# Altium PCB CUSP_PI_Hat.PcbDoc
Units mm, origin at the board's own origin, x right, y up, seen from the top; angles counter-clockwise.
Board outline 64.99 x 16.25 mm, 2 copper layers (Top Layer, Bottom Layer), stack 1.1 mm thick; 7 components, 30 nets, 90 pads, 15 vias.
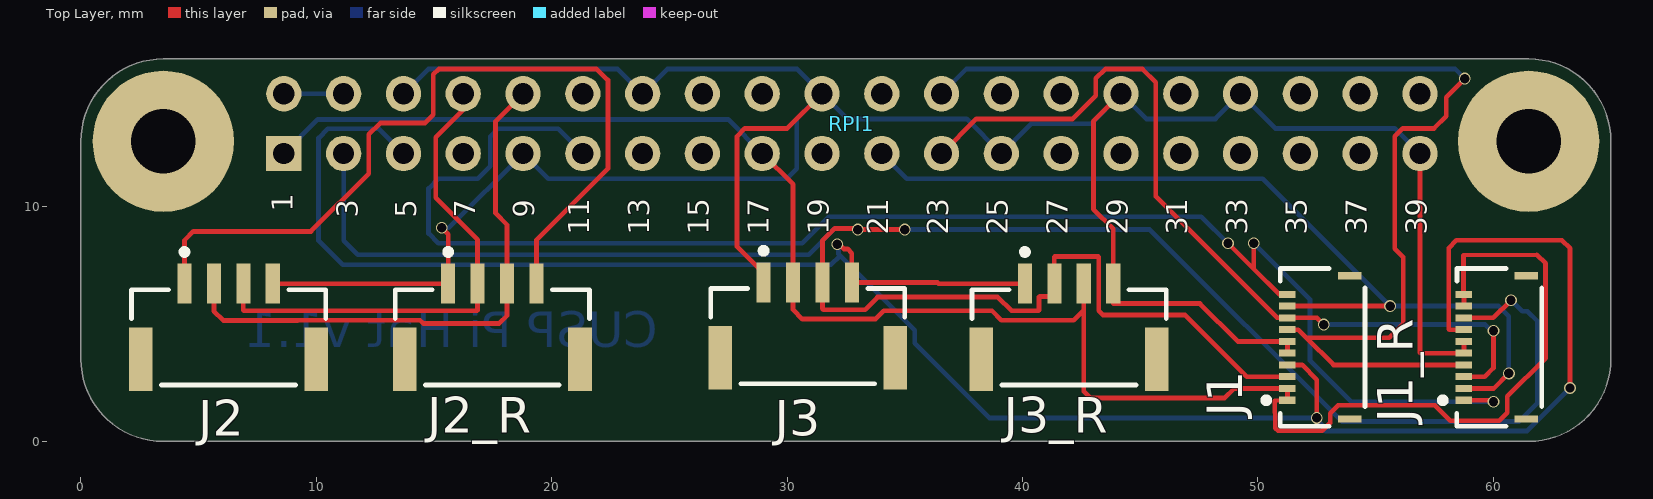
[diagram p0: Top Layer view]
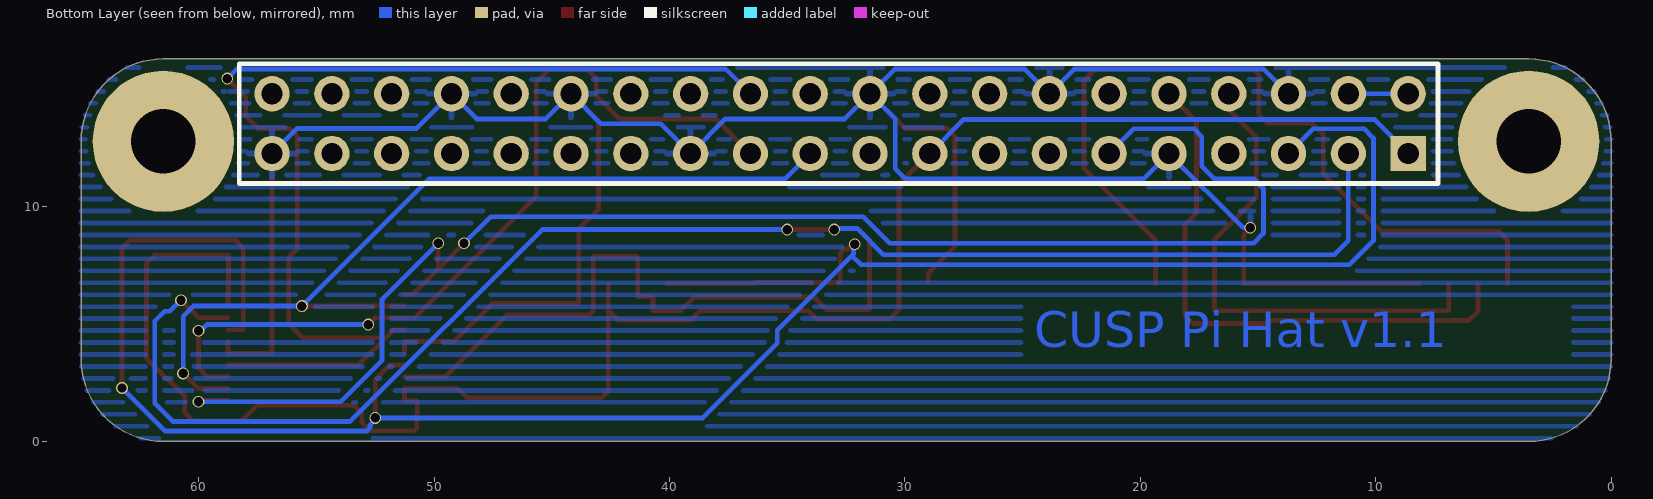
[diagram p1: Bottom Layer view, seen from below]

## Layer stack, top to bottom
Top Solder: solder mask 0.05, Solder Resist, Dk 3.5
Top Layer: signal copper 0.1
Dielectric 1: dielectric 0.9, FR-4, Dk 4.6
Bottom Layer: signal copper 0.1
Bottom Solder: solder mask 0.05, Solder Resist, Dk 3.5

## Board outline
0,3.5 0,12.75 cw(c3.5,12.75) 3.5,16.25 61.5,16.25 cw(c61.496,12.754) 64.992,12.75 64.992,3.5 cw(c61.496,3.496) 61.5,0 3.5,0 cw(c3.5,3.5)

## Design rules (kind name [scope] priority, off if disabled: settings)
Clearance [All] p1: gap=0.2 ignorepadtopadclearanceinfootprint=FALSE
HoleSize [All] p1: absolutevalues=TRUE maxlimit=3 minlimit=0.025 maxpercent=80.000 minpercent=20.000
PolygonConnect [All] p1: connectstyle=Relief reliefconductorwidth=0.254 reliefentries=4 polygonreliefangle="90 Angle" airgapwidth=0.254
RoomDefinition CUSP_PI_Hat [InComponentClass('CUSP_PI_Hat')] p1: confinementstyle=ConfineIn formatcopy=TRUE lockcomponents=FALSE outline 65.5,-0.5 -0.5,-0.5 -0.5,16.5 65.5,16.5
RoutingVias [All] p1: holewidth=0.4 width=0.5 viastyle="Through Hole" minholewidth=0.4 minwidth=0.5 maxholewidth=0.4 maxwidth=0.5
SilkToSolderMaskClearance [IsPad] p1: minsilkscreentomaskgap=0.1 clearancetoexposedcopper=TRUE
SolderMaskExpansion [All] p1: expansion=0.102 istentingtop=FALSE
Width [All] p1: maxlimit=0.254 minlimit=0.1 preferedwidth=0.2
28 further rules are at their usual default settings.

## Components (designator, comment, footprint, x,y, rotation, side; value= is the part's Value field where it differs from the comment)
J1 "503480-1000" MOLX-503480-1000 52.575,4 r90 top
J1_R "503480-1000" MOLX-503480-1000 60.075,4 r90 top
J2 "SM04B-GHS-TB(LF)(SN)" FP-SM04B-GHS-TB_LF_SN-MFG 6.275,4.425 r0 top
J2_R "SM04B-GHS-TB(LF)(SN)" FP-SM04B-GHS-TB_LF_SN-MFG 17.475,4.425 r0 top
J3 "SM04B-GHS-TB(LF)(SN)" FP-SM04B-GHS-TB_LF_SN-MFG 30.875,4.475 r0 top
J3_R "SM04B-GHS-TB(LF)(SN)" FP-SM04B-GHS-TB_LF_SN-MFG 41.975,4.425 r0 top
RPI1 "RPI GPIO Connector" RPI 32.75,13.5 r180 top

## Footprints (in the part's own frame and the unit in brackets; to place one, negate y for a bottom-side part, rotate by r counter-clockwise, add the part's x,y. Pads: shape width x height; smd on the part's side, far side on the other; paste and mask are expansions set on the pad)
FP-SM04B-GHS-TB_LF_SN-MFG [mm]
  rect 0.6x1.7 smd paste+0 mask+0: 1(-1.875,2.275) 2(-0.625,2.275) 3(0.625,2.275) 4(1.875,2.275)
  rect 1x2.7 smd paste+0 mask+0: 5(-3.725,-0.925) 6(3.725,-0.925)
  silkscreen extent -4.12,-2.03 4.13,3.75, body extent -4.33,-2.37 4.33,3.22, height 0.25
MOLX-503480-1000 [mm] "FPC Connector, 10-Leads, Right Angle, Pitch 0.5 mm, Mated Height 1.0 mm, SMT"
  rect 0.3x0.7 smd: 1(-2.25,1.325) 2(-1.75,1.325) 3(-1.25,1.325) 4(-0.75,1.325) 5(-0.25,1.325) 6(0.25,1.325) 7(0.75,1.325) 8(1.25,1.325) 9(1.75,1.325) 10(2.25,1.325)
  rect 0.3x1 smd: MP1(-3.04,-1.325) MP2(3.04,-1.325)
  silkscreen extent -3.35,-1.97 3.35,2.35, body extent -3.35,-1.98 3.35,1.62, height 1.91
RPI [mm]
  rect 1.5x1.5 hole 0.9: 1(24.13,1.27)
  round 1.5 hole 0.9: 2(24.13,-1.27) 3(21.59,1.27) 4(21.59,-1.27) 5(19.05,1.27) 6(19.05,-1.27) 7(16.51,1.27) 8(16.51,-1.27) 9(13.97,1.27) 10(13.97,-1.27) 11(11.43,1.27) 12(11.43,-1.27) 13(8.89,1.27) 14(8.89,-1.27) 15(6.35,1.27) 16(6.35,-1.27) 17(3.81,1.27) 18(3.81,-1.27) 19(1.27,1.27) 20(1.27,-1.27) 21(-1.27,1.27) 22(-1.27,-1.27) 23(-3.81,1.27) 24(-3.81,-1.27) 25(-6.35,1.27) 26(-6.35,-1.27) 27(-8.89,1.27) 28(-8.89,-1.27) 29(-11.43,1.27) 30(-11.43,-1.27) 31(-13.97,1.27) 32(-13.97,-1.27) 33(-16.51,1.27) 34(-16.51,-1.27) 35(-19.05,1.27) 36(-19.05,-1.27) 37(-21.59,1.27) 38(-21.59,-1.27) 39(-24.13,1.27) 40(-24.13,-1.27)
  body extent -25.52,-2.63 25.53,2.38, height 8.5

## Part data
J1 J1_R: library part CMP-1241-00115-1, "0.5 mm Pitch Easy-On(TM) BackFlip(TM) Type FPC Connector, 1.0 mm Mated Height, Right Angle, SMT, Dual Contact, 10 Circuits, -40 to 85 degC, ELV and RoHS Compliant, Tape and Reel", Current (Max per Contact)=0.5A, Manufacturer=Molex, Voltage (Max)="50V AC (RMS)/DC", Circuits (Loaded)=10, ComponentLink1Description="Manufacturer URL", ComponentLink1URL=http://www.molex.com/molex/index.jsp, ComponentLink2Description=Datasheet, ComponentLink2URL=http://www.molex.com/webdocs/datasheets/pdf/en-us/5034801000_FFC_FPC_CONNECTORS.pdf, ComponentLink3Description="Package Specification", ComponentLink3URL=http://www.molex.com/pdm_docs/sd/5034801000_sd.pdf, Contact Position=Dual, Durability (mating cycles max)=10, Entry Angle="90degrees Angle", Mated Height=1.00mm, Material - Metal="Phosphor Bronze", Material - Plating Mating=Gold, Material - Plating Termination="Gold, Tin", Mounting Technology="Surface Mount", Number of Rows=1, Orientation="Right Angle", PackageDescription="10-Lead FPC Connector, Pitch 0.5 mm", PackageReference=503480-1000, PackageVersion="Rev. F, 09/2012", Packing="Tape and Reel", PartNumber=503480-1000, PCB Locator=No, PCB Retention=Yes, Pitch - Mating Interface=0.50mm, Polarized to PCB=Yes, RoHS=TRUE, Stackable=No
J2 J2_R J3 J3_R: library part CMP-17439-000411-1, "CONN HEADER SMD R/A 4POS 1.25MM", Current Rating=1A, Housing Color=Natural, Voltage Rating=50V, Contact Material=Bronze, Contact Plating=Tin, Housing Material=Nylon, Lead Free="Lead Free", Mount="Surface Mount", Number of Contacts=4, Number of Positions=4, Number of Rows=1, Orientation="Right Angle", Packaging="Cut Tape", Pitch=1.25mm, REACH SVHC="No SVHC", Series=GH, Termination=Solder
RPI1: library part "rpi connector", "GPIO Header for Raspberry Pi A+/B+/Pi 2/Pi 3 - 2x20", Manufacturer="SparkFun Electronics", Manufacturer Part Number=PRT-14017, Supplier Part Number 1=1568-1462-ND, Accessory Type=Connector, Category="Development Boards, Kits, Programmers", ComponentLink1Description=https://cdn.sparkfun.com/datasheets/Dev/RaspberryPi/12313.pdf, ComponentLink1URL=https://cdn.sparkfun.com/datasheets/Dev/RaspberryPi/12313.pdf, For Use With/Related Products="Raspberry Pi", Nils Minor=author, nilsminor@web.de=mail, Part Status=Active, Pricing 1="1=1.84 (EUR)", RoHS="RoHS Compliant", Stock 1=150, Supplier 1=Digi-Key

## Free pads (board coordinates)
  round 6 hole 2.75: ""(3.5,12.75) ""(61.5,12.75)

## Via types
v1: diameter 0.5, hole 0.4, Top Layer to Bottom Layer, 15 vias

## Nets (pads, with @x,y where several pads share a name; then routed paths per layer and width w, separated by ;. In a path a pad name is that pad's centre, name@x,y a point inside that pad or via, vN(x,y) a via of type N, cw(c..) or ccw(c..) an arc to the next point about the centre after c; other vN are vias at no path point)
+3V3: J1.1 J1.2 J1_R.9 J1_R.10 J3.2 J3_R.3 RPI1.1 RPI1.17 | length 81.2
  Top Layer w0.2: RPI1.17 30.25,10.92 J3.2 30.25,5.599 30.649,5.2 33.75,5.2 34.098,5.548 38.702,5.548 39.1,5.15 42.176,5.15 42.6,5.574 ; J3_R.3 42.6,5.574 ; J1_R.9 J1_R.10 58.735,6.25 58.735,7.91 61.846,7.936 62.215,7.568 62.215,3.542 60.589,1.916 60.589,1.218 60.246,0.875 58.176,0.875 57.516,1.535 53.401,1.535 53.064,1.199 53.064,0.786 52.728,0.45 50.931,0.45 50.851,0.45 50.734,0.567 50.731,0.646 50.708,1.725 J1.1 J1.2 48.99,2.25 48.59,1.85 42.873,1.85 42.6,2.123 42.6,5.574
  Bottom Layer w0.2: RPI1.1 10.07,13.68 27.49,13.68 RPI1.17
+5V: RPI1.2 RPI1.4 | length 2.5
  Bottom Layer w0.2: RPI1.2 RPI1.4
GND: J1.5 J1.6 J1_R.5 J1_R.6 J2.4 J2_R.1 J3.1 J3_R.4 RPI1.6 RPI1.9 RPI1.14 RPI1.20 RPI1.25 RPI1.30 RPI1.34 RPI1.39 | length 119.7
  Top Layer w0.2: J2.4 J2_R.1 15.6,8.799 v1(15.326,9.073) ; J3.1 29,7.14 27.874,8.266 27.874,12.965 28.204,13.295 30.005,13.295 RPI1.20 ; RPI1.30 43.012,13.602 43.012,9.866 43.85,9.028 J3_R.4 43.85,5.859 47.534,5.859 49.143,4.25 J1.6 J1.5 ; RPI1.39 56.88,3.776 56.906,3.75 J1_R.5 J1_R.6
  Bottom Layer w0.2: RPI1.6 14.75,15.82 22.81,15.82 RPI1.14 24.91,15.82 30.43,15.82 RPI1.20 ; v1(15.326,9.073) 15.623,9.073 RPI1.9 19.849,11.162 29.982,11.162 30.414,11.593 30.414,13.704 RPI1.20 ; RPI1.39 55.815,13.295 50.735,13.295 RPI1.34 48.192,13.702 45.249,13.702 RPI1.30 42.909,13.498 40.369,13.498 RPI1.25 37.629,13.702 32.549,13.702 RPI1.20
NetJ1_3: J1.3 J1_R.8 J3.3 J3_R.2 RPI1.3 | length 96.7
  Top Layer w0.2: v1(33,9) v1(35,9) ; v1@33.008,9.05 32.022,9.05 31.5,8.528 J3.3 31.5,5.631 31.531,5.6 33.309,5.6 33.842,6.132 38.95,6.132 39.532,5.55 40.675,5.55 40.701,5.575 40.701,6.132 40.726,6.158 41.35,6.158 J3_R.2 41.35,7.834 41.375,7.86 43.215,7.86 43.241,7.834 43.241,5.548 43.42,5.369 46.914,5.369 49.533,2.75 J1.3 ; J1_R.8 60,5.25 v1(60.75,6)
  Bottom Layer w0.2: RPI1.3 11.16,8.533 11.757,7.936 30.908,7.936 32.022,9.05 32.95,9.05 v1(33,9) ; v1(35,9) 45.402,9 53.553,0.849 61.095,0.849 61.859,1.613 61.859,5.116 61.446,5.529 61.221,5.529 v1(60.75,6)
NetJ1_4: J1.4 J1_R.7 J3.4 J3_R.1 RPI1.5 | length 95.1
  Top Layer w0.2: v1(32.125,8.375) 32.206,8.375 32.405,8.176 32.574,8.176 32.75,8 J3.4 36.383,6.75 36.433,6.7 J3_R.1 ; J1.4 51.877,3.25 52.5,2.627 v1(52.5,1) ; J1_R.7 58.125,4.75 58.1,4.775 58.1,8.215 58.43,8.545 62.913,8.545 63.256,8.203 v1(63.256,2.272)
  Bottom Layer w0.2: RPI1.5 12.65,13.28 10.485,13.28 10.094,12.889 10.094,8.533 11.122,7.504 31.862,7.504 32.25,7.892 ; v1(32.125,8.375) 32.182,8.318 32.182,7.96 32.25,7.892 ; v1(63.256,2.272) 61.427,0.443 52.862,0.443 52.721,0.584 52.721,0.698 52.5,0.919 v1(52.5,1) 38.594,1 35.422,4.172 35.422,4.72 32.25,7.892
NetJ1_7: J1.7 J1_R.4 RPI1.24 | length 47.9
  Top Layer w0.2: J1.7 51.71,4.75 52.055,4.405 ; J1_R.4 53.21,3.25 52.055,4.405 ; v1(58.786,15.415) 57.998,14.627 57.998,13.816 57.477,13.295 56.144,13.295 55.814,12.965 55.814,8.19 56.169,7.834 56.169,5.002 55.572,4.405 52.055,4.405
  Bottom Layer w0.2: RPI1.24 37.611,15.821 58.379,15.821 v1(58.786,15.415)
NetJ1_8: J1.8 J1_R.3 RPI1.23 | length 35.8
  Top Layer w0.2: RPI1.23 38.032,13.702 42.123,13.702 43.114,14.692 43.114,15.426 43.507,15.82 45.095,15.82 45.654,15.261 45.654,10.406 50.81,5.25 J1.8 52.505,5.25 v1(52.791,4.964) ; J1_R.3 59.632,2.75 60.005,3.123 v1(60.005,4.7)
  Bottom Layer w0.2: v1(52.791,4.964) 59.66,4.964 59.924,4.7 v1(60.005,4.7)
NetJ1_9: J1.9 J1_R.2 RPI1.21 | length 38.5
  Top Layer w0.2: J1.9 v1(55.611,5.75) ; J1_R.2 60.017,2.25 v1(60.658,2.89)
  Bottom Layer w0.2: RPI1.21 35.089,11.162 50.199,11.162 v1(55.611,5.75) 60.222,5.75 60.658,5.314 v1(60.658,2.89)
NetJ1_10: J1.10 J1_R.1 RPI1.11 | length 66
  Top Layer w0.2: v1(48.727,8.418) 49.819,7.326 ; v1(49.819,8.418) 49.819,7.326 ; J1.10 50.896,6.25 49.819,7.326 ; J1_R.1 59.942,1.75 v1(60.005,1.687)
  Bottom Layer w0.2: RPI1.11 20.27,13.28 17.714,13.28 17.384,12.95 17.384,11.695 16.85,11.162 15.186,11.162 14.767,10.743 14.767,8.838 15.186,8.418 30.642,8.418 31.774,9.55 47.596,9.55 v1(48.727,8.418) ; v1(49.819,8.418) 52.207,6.031 52.207,3.44 53.96,1.687 v1(60.005,1.687)
NetJ2_1: J2.1 J2_R.4 | length 34.9
  Top Layer w0.2: J2.1 4.4,8.55 4.772,8.922 9.772,8.922 12.227,11.378 12.227,13.041 12.71,13.524 14.615,13.524 14.971,13.879 14.971,15.592 15.199,15.82 21.917,15.82 22.387,15.35 22.387,11.593 19.35,8.556 J2_R.4
NetJ2_2: J2.2 J2_R.3 RPI1.10 | length 24.1
  Top Layer w0.2: J2.2 5.65,5.534 6.042,5.142 9.197,5.142 9.205,5.15 14.404,5.15 14.539,5.015 17.77,5.015 18.1,5.345 J2_R.3 18.1,9.206 17.612,9.694 17.612,13.602 RPI1.10
NetJ2_3: J2.3 J2_R.2 RPI1.8 | length 21.5
  Top Layer w0.2: J2.3 6.9,5.574 6.925,5.548 8.798,5.548 8.8,5.55 14.948,5.55 14.95,5.548 16.825,5.548 16.85,5.574 J2_R.2 16.85,8.571 15.072,10.349 15.072,12.914 16.24,14.082 RPI1.8
NetRPI1_7: RPI1.7
NetRPI1_12: RPI1.12
NetRPI1_13: RPI1.13
NetRPI1_15: RPI1.15
NetRPI1_16: RPI1.16
NetRPI1_18: RPI1.18
NetRPI1_19: RPI1.19
NetRPI1_22: RPI1.22
NetRPI1_26: RPI1.26
NetRPI1_29: RPI1.29
NetRPI1_31: RPI1.31
NetRPI1_32: RPI1.32
NetRPI1_33: RPI1.33
NetRPI1_35: RPI1.35
NetRPI1_36: RPI1.36
NetRPI1_37: RPI1.37
NetRPI1_38: RPI1.38
NetRPI1_40: RPI1.40
pads on no net: J1.MP1 J1.MP2 J1_R.MP1 J1_R.MP2 J2.5 J2.6 J2_R.5 J2_R.6 J3.5 J3.6 J3_R.5 J3_R.6 RPI1.27 RPI1.28

## Polygon pours and split planes (outlines as drawn)
GND on Bottom Layer "GND_L02_P000" (hatched Horizontal grid 0.508 track 0.203, pour order 0): 61.5,16.25 cw(c61.5,12.75) 65,12.75 65,3.5 cw(c61.5,3.5) 61.5,0 3.5,0 cw(c3.5,3.5) 0,3.5 0,12.75 cw(c3.5,12.75) 3.5,16.25 25.5,16.25

## Other copper
Bottom Layer:
  text "CUSP Pi Hat v1.1" at 24.496,4.004 h1.52

## Silkscreen, mask and mechanical layers (free items; w line width, h text height)
Top Overlay:
  text "1" at 9,9.75 h0.89 r90
  text "3" at 11.75,9.5 h0.89 r90
  text "5" at 14.25,9.5 h0.89 r90
  text "7" at 16.75,9.5 h0.89 r90
  text "9" at 19.25,9.5 h0.89 r90
  text "11" at 21.6,8.77 h0.89 r90
  text "13" at 24.14,8.77 h0.89 r90
  text "15" at 26.68,8.77 h0.89 r90
  text "17" at 29.22,8.77 h0.89 r90
  text "19" at 31.76,8.77 h0.89 r90
  text "21" at 34.3,8.77 h0.89 r90
  text "23" at 36.84,8.77 h0.89 r90
  text "25" at 39.38,8.77 h0.89 r90
  text "27" at 41.92,8.77 h0.89 r90
  text "29" at 44.46,8.77 h0.89 r90
  text "31" at 47,8.77 h0.89 r90
  text "33" at 49.54,8.77 h0.89 r90
  text "35" at 52.08,8.77 h0.89 r90
  text "37" at 54.62,8.77 h0.89 r90
  text "39" at 57.16,8.77 h0.89 r90
M2: Outline:
  the board outline again, w0.254